# Altium PCB PCB1.PcbDoc
Units mil, origin at the board's own origin, x right, y up, seen from the top; angles counter-clockwise.
Board outline 6000 x 4000 mil, 2 copper layers (Top Layer, Bottom Layer); 173 components, 56 nets, 300 pads, 0 vias.
Unrouted connection lines stored in the file: 110.
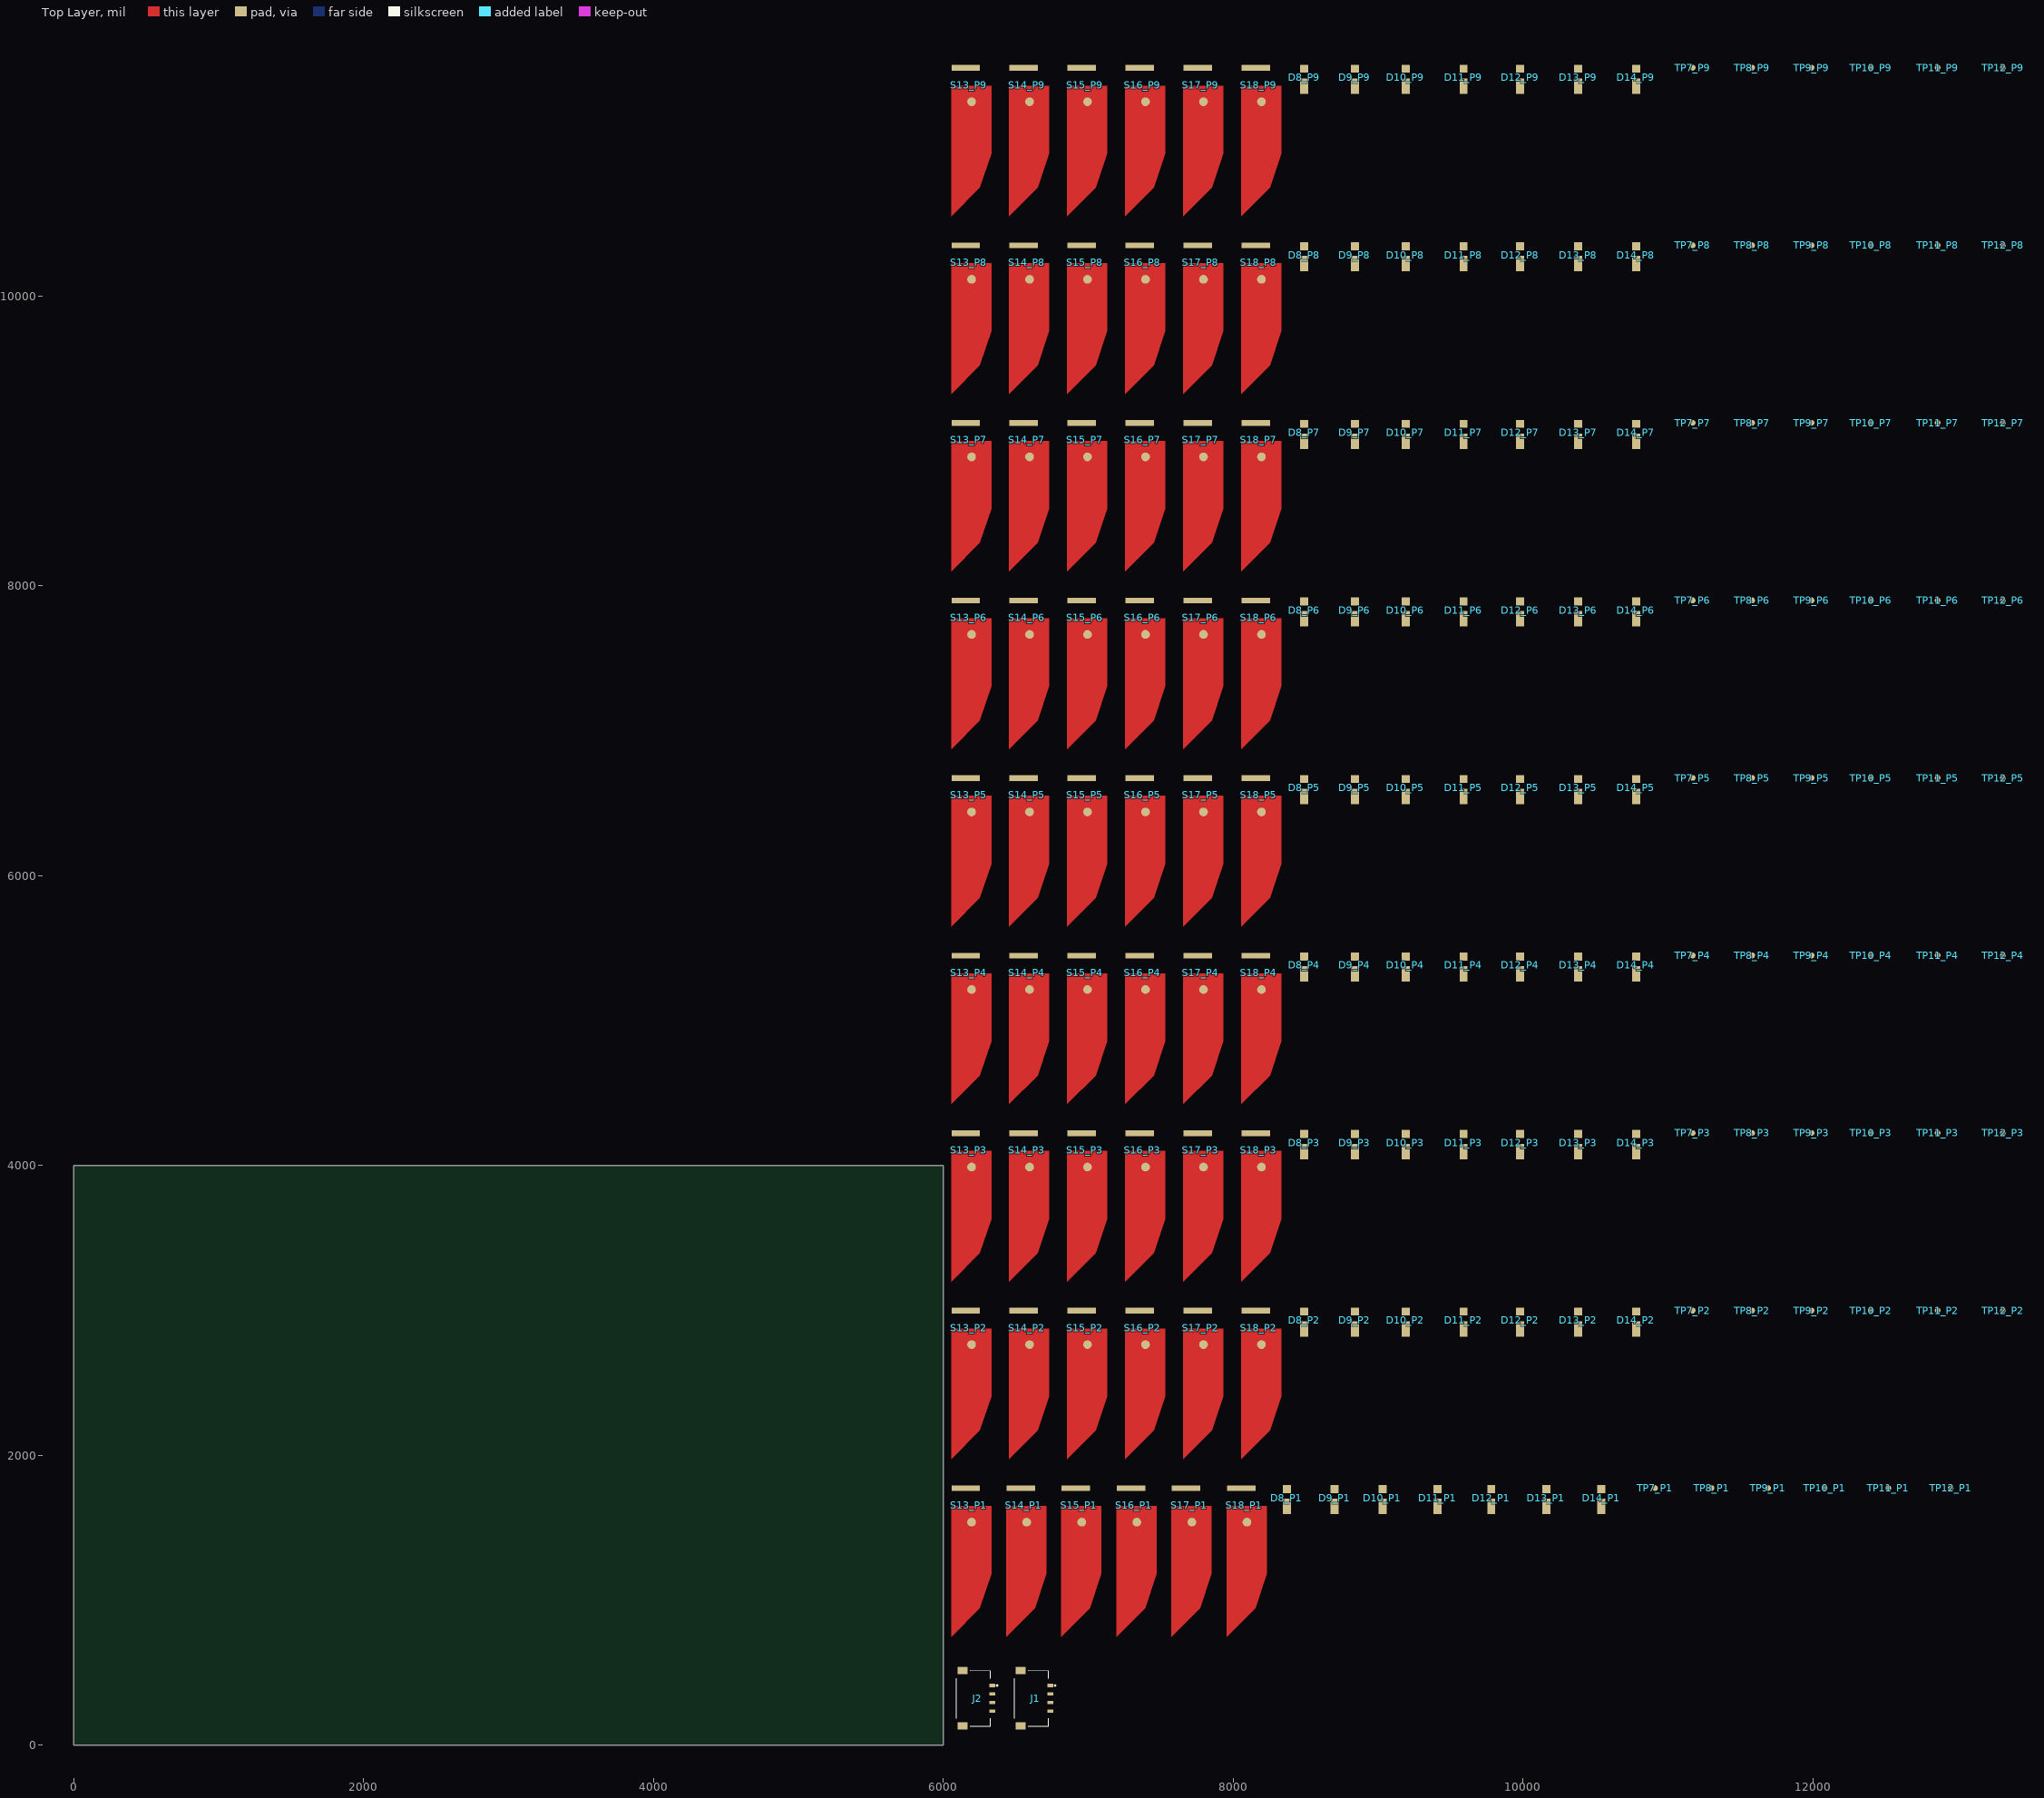
[diagram p0: Top Layer view]
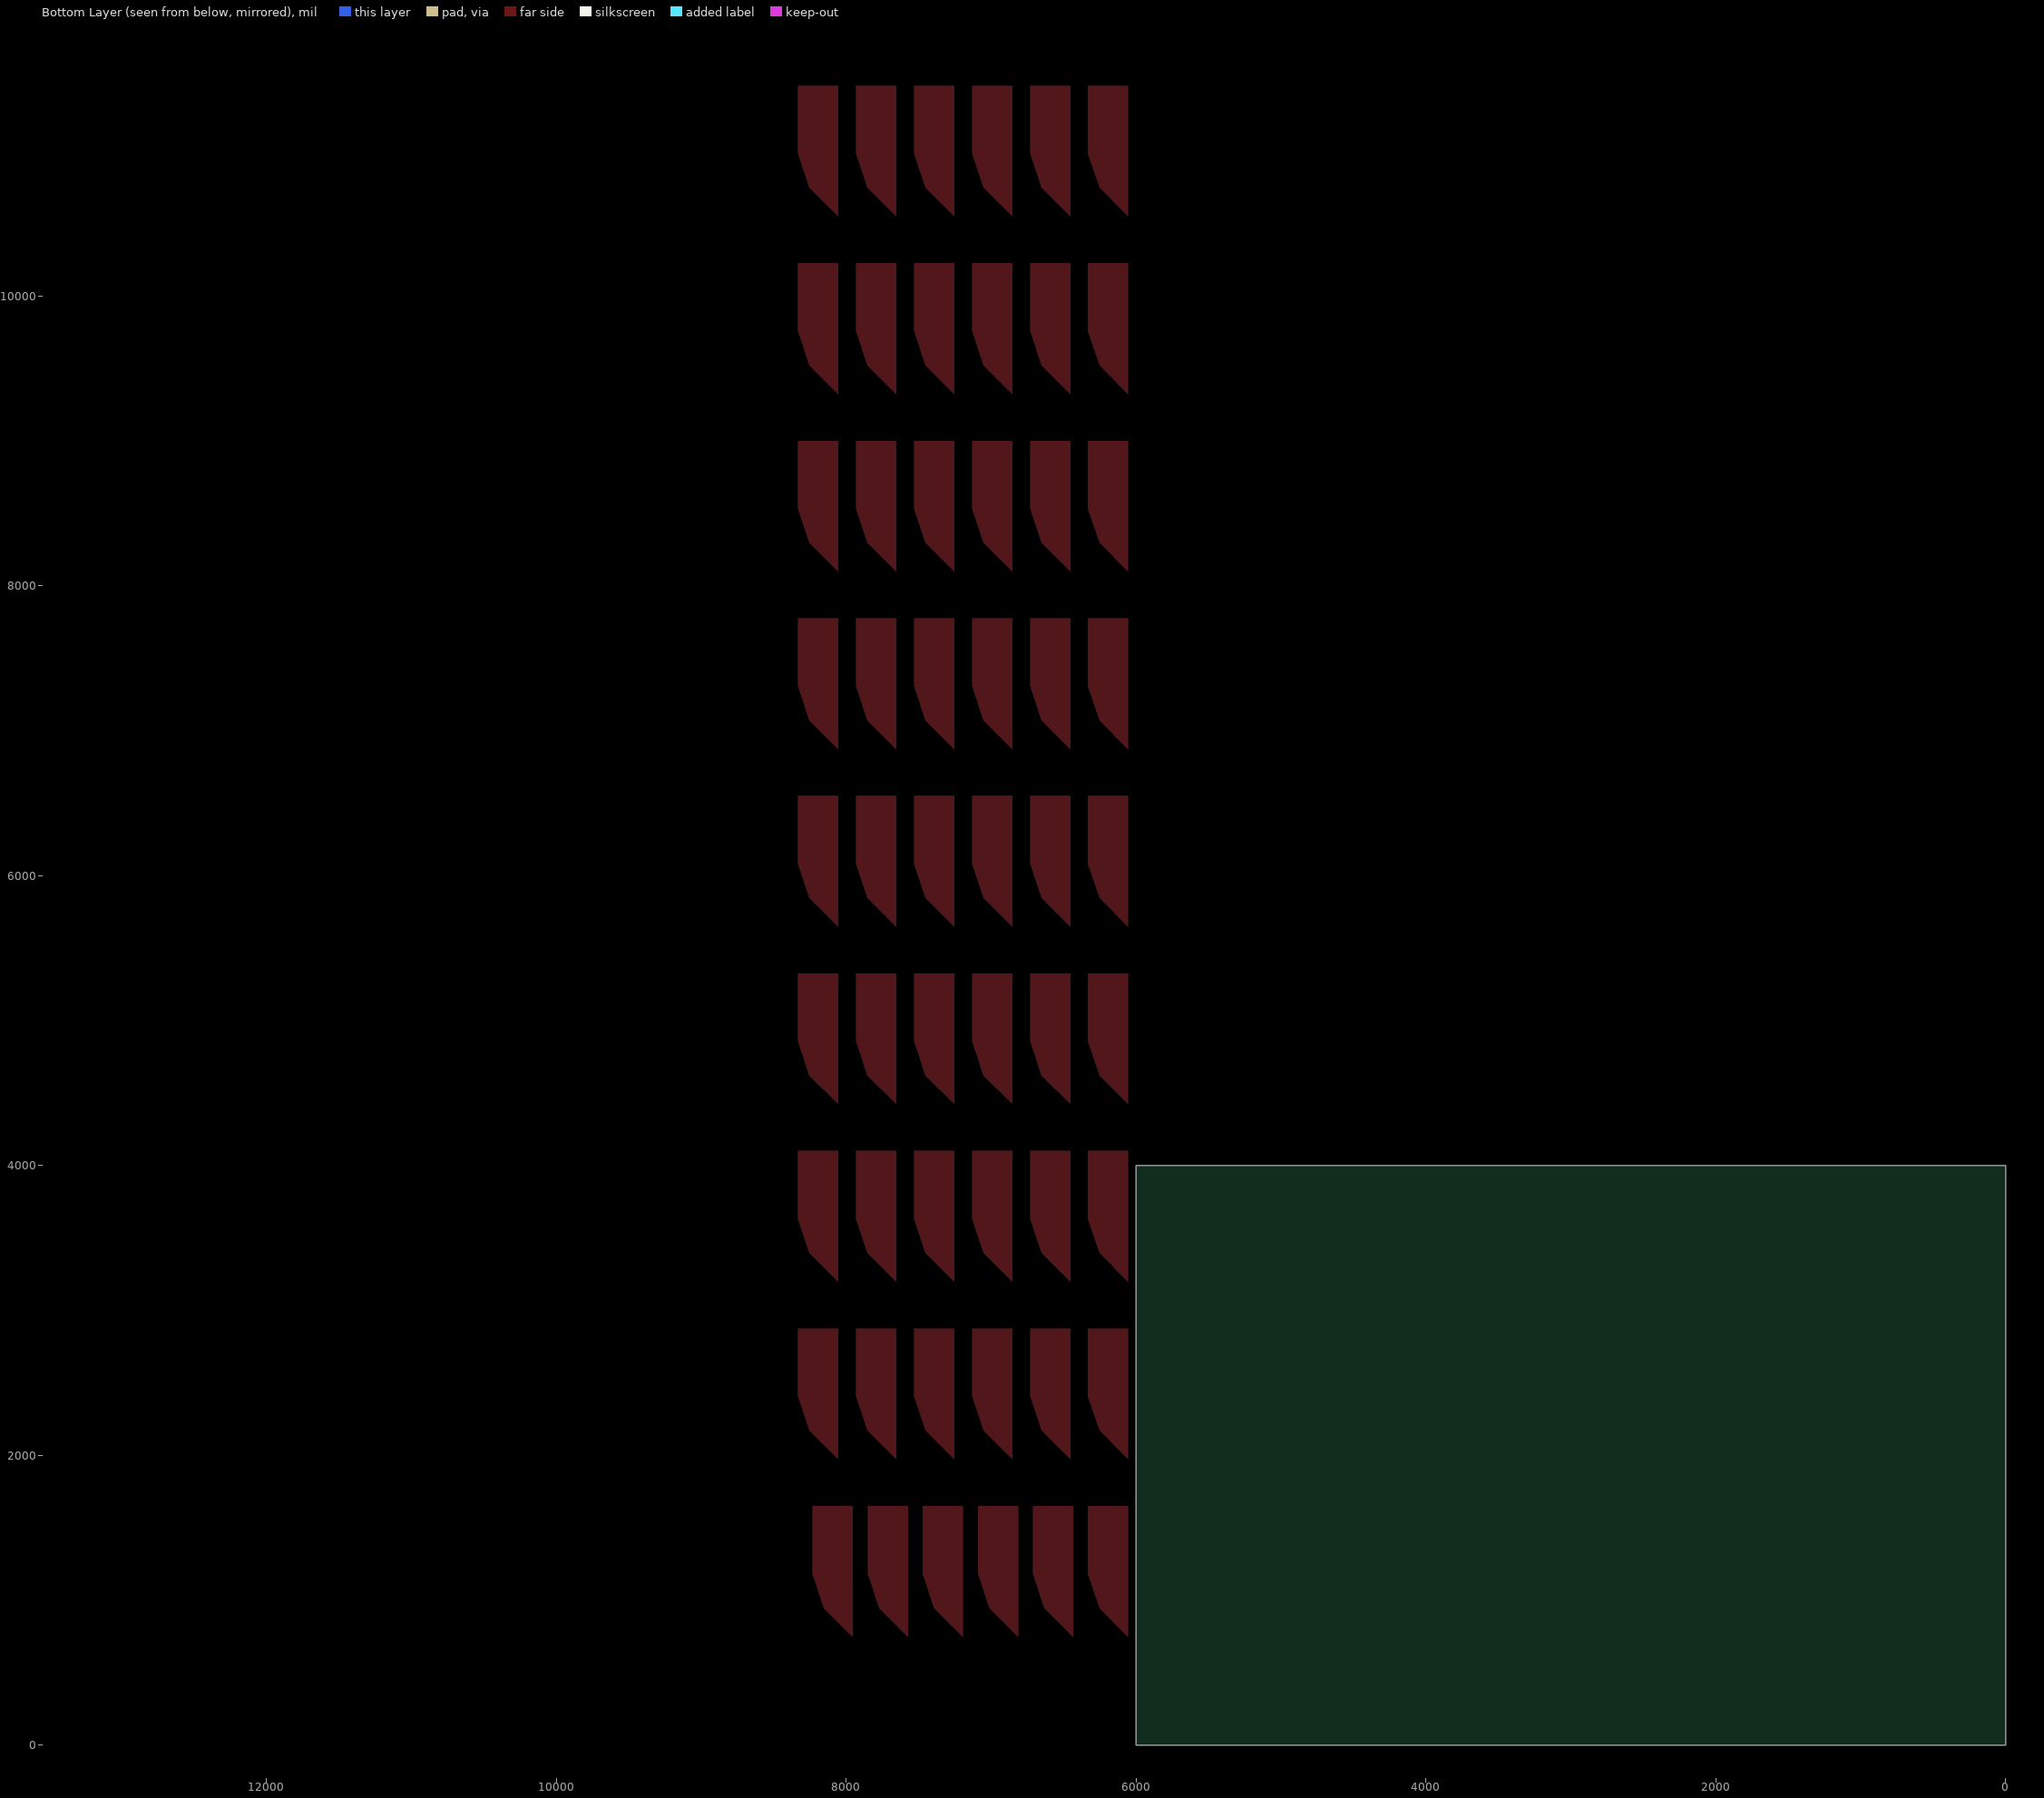
[diagram p1: Bottom Layer view, seen from below]

## Layer stack, top to bottom
Top Solder: solder mask 0.4, Solder Resist, Dk 3.5
Top Layer: signal copper 1.4
Dielectric 1: dielectric 12.6, FR-4, Dk 4.8
Bottom Layer: signal copper 1.4
Bottom Solder: solder mask 0.4, Solder Resist, Dk 3.5

## Board outline
0,0 6000,0 6000,4000 0,4000

## Design rules (kind name [scope] priority, off if disabled: settings)
Clearance [All] p1: gap=10 ignorepadtopadclearanceinfootprint=FALSE except(0: Arc-Hole Track-Hole SMDPad-Hole THPad-Hole Via-Hole Fill-Hole Poly-Hole Region-Hole Text-Hole)
PolygonConnect [All] p1: connectstyle=Relief reliefconductorwidth=10 reliefentries=4 polygonreliefangle="90 Angle" airgapwidth=10
RoomDefinition SolarPanel [InComponentClass('SolarPanel')] p1: confinementstyle=ConfineIn formatcopy=TRUE lockcomponents=FALSE outline 6045,60 6805,60 6805,690 6045,690
RoomDefinition P9 [InComponentClass('P9')] p2: confinementstyle=ConfineIn formatcopy=TRUE lockcomponents=FALSE outline 6045,10545 13705,10545 13705,11715 6045,11715
RoomDefinition P8 [InComponentClass('P8')] p3: confinementstyle=ConfineIn formatcopy=TRUE lockcomponents=FALSE outline 6045,9320 13705,9320 13705,10490 6045,10490
RoomDefinition P7 [InComponentClass('P7')] p4: confinementstyle=ConfineIn formatcopy=TRUE lockcomponents=FALSE outline 6045,8095 13705,8095 13705,9265 6045,9265
RoomDefinition P6 [InComponentClass('P6')] p5: confinementstyle=ConfineIn formatcopy=TRUE lockcomponents=FALSE outline 6045,6870 13705,6870 13705,8040 6045,8040
RoomDefinition P5 [InComponentClass('P5')] p6: confinementstyle=ConfineIn formatcopy=TRUE lockcomponents=FALSE outline 6045,5645 13705,5645 13705,6815 6045,6815
RoomDefinition P4 [InComponentClass('P4')] p7: confinementstyle=ConfineIn formatcopy=TRUE lockcomponents=FALSE outline 6045,4420 13705,4420 13705,5590 6045,5590
RoomDefinition P3 [InComponentClass('P3')] p8: confinementstyle=ConfineIn formatcopy=TRUE lockcomponents=FALSE outline 6045,3195 13705,3195 13705,4365 6045,4365
RoomDefinition P2 [InComponentClass('P2')] p9: confinementstyle=ConfineIn formatcopy=TRUE lockcomponents=FALSE outline 6045,1970 13705,1970 13705,3140 6045,3140
RoomDefinition P1 [InComponentClass('P1')] p10: confinementstyle=ConfineIn formatcopy=TRUE lockcomponents=FALSE outline 6045,745 13325,745 13325,1915 6045,1915
RoutingVias [All] p1: holewidth=28 width=50 viastyle="Through Hole" minholewidth=28 minwidth=50 maxholewidth=28 maxwidth=50
SolderMaskExpansion [All] p1: expansion=4
Width [All] p1: maxlimit=10 minlimit=10 preferedwidth=10
30 further rules are at their usual default settings.

## Classes and differential pairs
channel class RowSingle: P1 P2 P3 P4 P5 P6 P7 P8 P9
component class P8: D8_P8 D9_P8 D10_P8 D11_P8 D12_P8 D13_P8 D14_P8 S13_P8 S14_P8 S15_P8 S16_P8 S17_P8 S18_P8 TP7_P8 TP8_P8 TP9_P8 TP10_P8 TP11_P8 TP12_P8
component class P7: D8_P7 D9_P7 D10_P7 D11_P7 D12_P7 D13_P7 D14_P7 S13_P7 S14_P7 S15_P7 S16_P7 S17_P7 S18_P7 TP7_P7 TP8_P7 TP9_P7 TP10_P7 TP11_P7 TP12_P7
component class P6: D8_P6 D9_P6 D10_P6 D11_P6 D12_P6 D13_P6 D14_P6 S13_P6 S14_P6 S15_P6 S16_P6 S17_P6 S18_P6 TP7_P6 TP8_P6 TP9_P6 TP10_P6 TP11_P6 TP12_P6
component class P5: D8_P5 D9_P5 D10_P5 D11_P5 D12_P5 D13_P5 D14_P5 S13_P5 S14_P5 S15_P5 S16_P5 S17_P5 S18_P5 TP7_P5 TP8_P5 TP9_P5 TP10_P5 TP11_P5 TP12_P5
component class P4: D8_P4 D9_P4 D10_P4 D11_P4 D12_P4 D13_P4 D14_P4 S13_P4 S14_P4 S15_P4 S16_P4 S17_P4 S18_P4 TP7_P4 TP8_P4 TP9_P4 TP10_P4 TP11_P4 TP12_P4
component class P3: D8_P3 D9_P3 D10_P3 D11_P3 D12_P3 D13_P3 D14_P3 S13_P3 S14_P3 S15_P3 S16_P3 S17_P3 S18_P3 TP7_P3 TP8_P3 TP9_P3 TP10_P3 TP11_P3 TP12_P3
component class P2: D8_P2 D9_P2 D10_P2 D11_P2 D12_P2 D13_P2 D14_P2 S13_P2 S14_P2 S15_P2 S16_P2 S17_P2 S18_P2 TP7_P2 TP8_P2 TP9_P2 TP10_P2 TP11_P2 TP12_P2
component class P1: D8_P1 D9_P1 D10_P1 D11_P1 D12_P1 D13_P1 D14_P1 S13_P1 S14_P1 S15_P1 S16_P1 S17_P1 S18_P1 TP7_P1 TP8_P1 TP9_P1 TP10_P1 TP11_P1 TP12_P1
component class P9: D8_P9 D9_P9 D10_P9 D11_P9 D12_P9 D13_P9 D14_P9 S13_P9 S14_P9 S15_P9 S16_P9 S17_P9 S18_P9 TP7_P9 TP8_P9 TP9_P9 TP10_P9 TP11_P9 TP12_P9
component class SolarPanel: J1 J2

## Components (designator, comment, footprint, x,y, rotation, side; value= is the part's Value field where it differs from the comment)
D8_P1 "SCHOTTKY_DIODE_B120-FDICT-NDSCHOTTKY_DIODE_B120-FDICT-ND" SB_DIODE 8370,1695 r90 top (schematic designator D8)
D8_P2 "SCHOTTKY_DIODE_B120-FDICT-NDSCHOTTKY_DIODE_B120-FDICT-ND" SB_DIODE 8490,2920 r90 top (schematic designator D8)
D8_P3 "SCHOTTKY_DIODE_B120-FDICT-NDSCHOTTKY_DIODE_B120-FDICT-ND" SB_DIODE 8490,4145 r90 top (schematic designator D8)
D8_P4 "SCHOTTKY_DIODE_B120-FDICT-NDSCHOTTKY_DIODE_B120-FDICT-ND" SB_DIODE 8490,5370 r90 top (schematic designator D8)
D8_P5 "SCHOTTKY_DIODE_B120-FDICT-NDSCHOTTKY_DIODE_B120-FDICT-ND" SB_DIODE 8490,6595 r90 top (schematic designator D8)
D8_P6 "SCHOTTKY_DIODE_B120-FDICT-NDSCHOTTKY_DIODE_B120-FDICT-ND" SB_DIODE 8490,7820 r90 top (schematic designator D8)
D8_P7 "SCHOTTKY_DIODE_B120-FDICT-NDSCHOTTKY_DIODE_B120-FDICT-ND" SB_DIODE 8490,9045 r90 top (schematic designator D8)
D8_P8 "SCHOTTKY_DIODE_B120-FDICT-NDSCHOTTKY_DIODE_B120-FDICT-ND" SB_DIODE 8490,10270 r90 top (schematic designator D8)
D8_P9 "SCHOTTKY_DIODE_B120-FDICT-NDSCHOTTKY_DIODE_B120-FDICT-ND" SB_DIODE 8490,11495 r90 top (schematic designator D8)
D9_P1 "SCHOTTKY_DIODE_B120-FDICT-NDSCHOTTKY_DIODE_B120-FDICT-ND" SB_DIODE 8700,1695 r90 top (schematic designator D9)
D9_P2 "SCHOTTKY_DIODE_B120-FDICT-NDSCHOTTKY_DIODE_B120-FDICT-ND" SB_DIODE 8840,2920 r90 top (schematic designator D9)
D9_P3 "SCHOTTKY_DIODE_B120-FDICT-NDSCHOTTKY_DIODE_B120-FDICT-ND" SB_DIODE 8840,4145 r90 top (schematic designator D9)
D9_P4 "SCHOTTKY_DIODE_B120-FDICT-NDSCHOTTKY_DIODE_B120-FDICT-ND" SB_DIODE 8840,5370 r90 top (schematic designator D9)
D9_P5 "SCHOTTKY_DIODE_B120-FDICT-NDSCHOTTKY_DIODE_B120-FDICT-ND" SB_DIODE 8840,6595 r90 top (schematic designator D9)
D9_P6 "SCHOTTKY_DIODE_B120-FDICT-NDSCHOTTKY_DIODE_B120-FDICT-ND" SB_DIODE 8840,7820 r90 top (schematic designator D9)
D9_P7 "SCHOTTKY_DIODE_B120-FDICT-NDSCHOTTKY_DIODE_B120-FDICT-ND" SB_DIODE 8840,9045 r90 top (schematic designator D9)
D9_P8 "SCHOTTKY_DIODE_B120-FDICT-NDSCHOTTKY_DIODE_B120-FDICT-ND" SB_DIODE 8840,10270 r90 top (schematic designator D9)
D9_P9 "SCHOTTKY_DIODE_B120-FDICT-NDSCHOTTKY_DIODE_B120-FDICT-ND" SB_DIODE 8840,11495 r90 top (schematic designator D9)
D10_P1 "SCHOTTKY_DIODE_B120-FDICT-NDSCHOTTKY_DIODE_B120-FDICT-ND" SB_DIODE 9030,1695 r90 top (schematic designator D10)
D10_P2 "SCHOTTKY_DIODE_B120-FDICT-NDSCHOTTKY_DIODE_B120-FDICT-ND" SB_DIODE 9190,2920 r90 top (schematic designator D10)
D10_P3 "SCHOTTKY_DIODE_B120-FDICT-NDSCHOTTKY_DIODE_B120-FDICT-ND" SB_DIODE 9190,4145 r90 top (schematic designator D10)
D10_P4 "SCHOTTKY_DIODE_B120-FDICT-NDSCHOTTKY_DIODE_B120-FDICT-ND" SB_DIODE 9190,5370 r90 top (schematic designator D10)
D10_P5 "SCHOTTKY_DIODE_B120-FDICT-NDSCHOTTKY_DIODE_B120-FDICT-ND" SB_DIODE 9190,6595 r90 top (schematic designator D10)
D10_P6 "SCHOTTKY_DIODE_B120-FDICT-NDSCHOTTKY_DIODE_B120-FDICT-ND" SB_DIODE 9190,7820 r90 top (schematic designator D10)
D10_P7 "SCHOTTKY_DIODE_B120-FDICT-NDSCHOTTKY_DIODE_B120-FDICT-ND" SB_DIODE 9190,9045 r90 top (schematic designator D10)
D10_P8 "SCHOTTKY_DIODE_B120-FDICT-NDSCHOTTKY_DIODE_B120-FDICT-ND" SB_DIODE 9190,10270 r90 top (schematic designator D10)
D10_P9 "SCHOTTKY_DIODE_B120-FDICT-NDSCHOTTKY_DIODE_B120-FDICT-ND" SB_DIODE 9190,11495 r90 top (schematic designator D10)
D11_P1 "SCHOTTKY_DIODE_B120-FDICT-NDSCHOTTKY_DIODE_B120-FDICT-ND" SB_DIODE 9410,1695 r90 top (schematic designator D11)
D11_P2 "SCHOTTKY_DIODE_B120-FDICT-NDSCHOTTKY_DIODE_B120-FDICT-ND" SB_DIODE 9590,2920 r90 top (schematic designator D11)
D11_P3 "SCHOTTKY_DIODE_B120-FDICT-NDSCHOTTKY_DIODE_B120-FDICT-ND" SB_DIODE 9590,4145 r90 top (schematic designator D11)
D11_P4 "SCHOTTKY_DIODE_B120-FDICT-NDSCHOTTKY_DIODE_B120-FDICT-ND" SB_DIODE 9590,5370 r90 top (schematic designator D11)
D11_P5 "SCHOTTKY_DIODE_B120-FDICT-NDSCHOTTKY_DIODE_B120-FDICT-ND" SB_DIODE 9590,6595 r90 top (schematic designator D11)
D11_P6 "SCHOTTKY_DIODE_B120-FDICT-NDSCHOTTKY_DIODE_B120-FDICT-ND" SB_DIODE 9590,7820 r90 top (schematic designator D11)
D11_P7 "SCHOTTKY_DIODE_B120-FDICT-NDSCHOTTKY_DIODE_B120-FDICT-ND" SB_DIODE 9590,9045 r90 top (schematic designator D11)
D11_P8 "SCHOTTKY_DIODE_B120-FDICT-NDSCHOTTKY_DIODE_B120-FDICT-ND" SB_DIODE 9590,10270 r90 top (schematic designator D11)
D11_P9 "SCHOTTKY_DIODE_B120-FDICT-NDSCHOTTKY_DIODE_B120-FDICT-ND" SB_DIODE 9590,11495 r90 top (schematic designator D11)
D12_P1 "SCHOTTKY_DIODE_B120-FDICT-NDSCHOTTKY_DIODE_B120-FDICT-ND" SB_DIODE 9780,1695 r90 top (schematic designator D12)
D12_P2 "SCHOTTKY_DIODE_B120-FDICT-NDSCHOTTKY_DIODE_B120-FDICT-ND" SB_DIODE 9980,2920 r90 top (schematic designator D12)
D12_P3 "SCHOTTKY_DIODE_B120-FDICT-NDSCHOTTKY_DIODE_B120-FDICT-ND" SB_DIODE 9980,4145 r90 top (schematic designator D12)
D12_P4 "SCHOTTKY_DIODE_B120-FDICT-NDSCHOTTKY_DIODE_B120-FDICT-ND" SB_DIODE 9980,5370 r90 top (schematic designator D12)
D12_P5 "SCHOTTKY_DIODE_B120-FDICT-NDSCHOTTKY_DIODE_B120-FDICT-ND" SB_DIODE 9980,6595 r90 top (schematic designator D12)
D12_P6 "SCHOTTKY_DIODE_B120-FDICT-NDSCHOTTKY_DIODE_B120-FDICT-ND" SB_DIODE 9980,7820 r90 top (schematic designator D12)
D12_P7 "SCHOTTKY_DIODE_B120-FDICT-NDSCHOTTKY_DIODE_B120-FDICT-ND" SB_DIODE 9980,9045 r90 top (schematic designator D12)
D12_P8 "SCHOTTKY_DIODE_B120-FDICT-NDSCHOTTKY_DIODE_B120-FDICT-ND" SB_DIODE 9980,10270 r90 top (schematic designator D12)
D12_P9 "SCHOTTKY_DIODE_B120-FDICT-NDSCHOTTKY_DIODE_B120-FDICT-ND" SB_DIODE 9980,11495 r90 top (schematic designator D12)
D13_P1 "SCHOTTKY_DIODE_B120-FDICT-NDSCHOTTKY_DIODE_B120-FDICT-ND" SB_DIODE 10160,1695 r90 top (schematic designator D13)
D13_P2 "SCHOTTKY_DIODE_B120-FDICT-NDSCHOTTKY_DIODE_B120-FDICT-ND" SB_DIODE 10380,2920 r90 top (schematic designator D13)
D13_P3 "SCHOTTKY_DIODE_B120-FDICT-NDSCHOTTKY_DIODE_B120-FDICT-ND" SB_DIODE 10380,4145 r90 top (schematic designator D13)
D13_P4 "SCHOTTKY_DIODE_B120-FDICT-NDSCHOTTKY_DIODE_B120-FDICT-ND" SB_DIODE 10380,5370 r90 top (schematic designator D13)
D13_P5 "SCHOTTKY_DIODE_B120-FDICT-NDSCHOTTKY_DIODE_B120-FDICT-ND" SB_DIODE 10380,6595 r90 top (schematic designator D13)
D13_P6 "SCHOTTKY_DIODE_B120-FDICT-NDSCHOTTKY_DIODE_B120-FDICT-ND" SB_DIODE 10380,7820 r90 top (schematic designator D13)
D13_P7 "SCHOTTKY_DIODE_B120-FDICT-NDSCHOTTKY_DIODE_B120-FDICT-ND" SB_DIODE 10380,9045 r90 top (schematic designator D13)
D13_P8 "SCHOTTKY_DIODE_B120-FDICT-NDSCHOTTKY_DIODE_B120-FDICT-ND" SB_DIODE 10380,10270 r90 top (schematic designator D13)
D13_P9 "SCHOTTKY_DIODE_B120-FDICT-NDSCHOTTKY_DIODE_B120-FDICT-ND" SB_DIODE 10380,11495 r90 top (schematic designator D13)
D14_P1 "SCHOTTKY_DIODE_B120-FDICT-NDSCHOTTKY_DIODE_B120-FDICT-ND" SB_DIODE 10540,1695 r90 top (schematic designator D14)
D14_P2 "SCHOTTKY_DIODE_B120-FDICT-NDSCHOTTKY_DIODE_B120-FDICT-ND" SB_DIODE 10780,2920 r90 top (schematic designator D14)
D14_P3 "SCHOTTKY_DIODE_B120-FDICT-NDSCHOTTKY_DIODE_B120-FDICT-ND" SB_DIODE 10780,4145 r90 top (schematic designator D14)
D14_P4 "SCHOTTKY_DIODE_B120-FDICT-NDSCHOTTKY_DIODE_B120-FDICT-ND" SB_DIODE 10780,5370 r90 top (schematic designator D14)
D14_P5 "SCHOTTKY_DIODE_B120-FDICT-NDSCHOTTKY_DIODE_B120-FDICT-ND" SB_DIODE 10780,6595 r90 top (schematic designator D14)
D14_P6 "SCHOTTKY_DIODE_B120-FDICT-NDSCHOTTKY_DIODE_B120-FDICT-ND" SB_DIODE 10780,7820 r90 top (schematic designator D14)
D14_P7 "SCHOTTKY_DIODE_B120-FDICT-NDSCHOTTKY_DIODE_B120-FDICT-ND" SB_DIODE 10780,9045 r90 top (schematic designator D14)
D14_P8 "SCHOTTKY_DIODE_B120-FDICT-NDSCHOTTKY_DIODE_B120-FDICT-ND" SB_DIODE 10780,10270 r90 top (schematic designator D14)
D14_P9 "SCHOTTKY_DIODE_B120-FDICT-NDSCHOTTKY_DIODE_B120-FDICT-ND" SB_DIODE 10780,11495 r90 top (schematic designator D14)
J1 "5040500491" 5040500491 6610,325 r90 top
J2 "5040500491" 5040500491 6210,325 r90 top
S13_P1 "SOLAR_CELL" SOLAR_CELL 6055,750 r0 top (schematic designator S13)
S13_P2 "SOLAR_CELL" SOLAR_CELL 6055,1975 r0 top (schematic designator S13)
S13_P3 "SOLAR_CELL" SOLAR_CELL 6055,3200 r0 top (schematic designator S13)
S13_P4 "SOLAR_CELL" SOLAR_CELL 6055,4425 r0 top (schematic designator S13)
S13_P5 "SOLAR_CELL" SOLAR_CELL 6055,5650 r0 top (schematic designator S13)
S13_P6 "SOLAR_CELL" SOLAR_CELL 6055,6875 r0 top (schematic designator S13)
S13_P7 "SOLAR_CELL" SOLAR_CELL 6055,8100 r0 top (schematic designator S13)
S13_P8 "SOLAR_CELL" SOLAR_CELL 6055,9325 r0 top (schematic designator S13)
S13_P9 "SOLAR_CELL" SOLAR_CELL 6055,10550 r0 top (schematic designator S13)
S14_P1 "SOLAR_CELL" SOLAR_CELL 6435,750 r0 top (schematic designator S14)
S14_P2 "SOLAR_CELL" SOLAR_CELL 6455,1975 r0 top (schematic designator S14)
S14_P3 "SOLAR_CELL" SOLAR_CELL 6455,3200 r0 top (schematic designator S14)
S14_P4 "SOLAR_CELL" SOLAR_CELL 6455,4425 r0 top (schematic designator S14)
S14_P5 "SOLAR_CELL" SOLAR_CELL 6455,5650 r0 top (schematic designator S14)
S14_P6 "SOLAR_CELL" SOLAR_CELL 6455,6875 r0 top (schematic designator S14)
S14_P7 "SOLAR_CELL" SOLAR_CELL 6455,8100 r0 top (schematic designator S14)
S14_P8 "SOLAR_CELL" SOLAR_CELL 6455,9325 r0 top (schematic designator S14)
S14_P9 "SOLAR_CELL" SOLAR_CELL 6455,10550 r0 top (schematic designator S14)
S15_P1 "SOLAR_CELL" SOLAR_CELL 6815,750 r0 top (schematic designator S15)
S15_P2 "SOLAR_CELL" SOLAR_CELL 6855,1975 r0 top (schematic designator S15)
S15_P3 "SOLAR_CELL" SOLAR_CELL 6855,3200 r0 top (schematic designator S15)
S15_P4 "SOLAR_CELL" SOLAR_CELL 6855,4425 r0 top (schematic designator S15)
S15_P5 "SOLAR_CELL" SOLAR_CELL 6855,5650 r0 top (schematic designator S15)
S15_P6 "SOLAR_CELL" SOLAR_CELL 6855,6875 r0 top (schematic designator S15)
S15_P7 "SOLAR_CELL" SOLAR_CELL 6855,8100 r0 top (schematic designator S15)
S15_P8 "SOLAR_CELL" SOLAR_CELL 6855,9325 r0 top (schematic designator S15)
S15_P9 "SOLAR_CELL" SOLAR_CELL 6855,10550 r0 top (schematic designator S15)
S16_P1 "SOLAR_CELL" SOLAR_CELL 7195,750 r0 top (schematic designator S16)
S16_P2 "SOLAR_CELL" SOLAR_CELL 7255,1975 r0 top (schematic designator S16)
S16_P3 "SOLAR_CELL" SOLAR_CELL 7255,3200 r0 top (schematic designator S16)
S16_P4 "SOLAR_CELL" SOLAR_CELL 7255,4425 r0 top (schematic designator S16)
S16_P5 "SOLAR_CELL" SOLAR_CELL 7255,5650 r0 top (schematic designator S16)
S16_P6 "SOLAR_CELL" SOLAR_CELL 7255,6875 r0 top (schematic designator S16)
S16_P7 "SOLAR_CELL" SOLAR_CELL 7255,8100 r0 top (schematic designator S16)
S16_P8 "SOLAR_CELL" SOLAR_CELL 7255,9325 r0 top (schematic designator S16)
S16_P9 "SOLAR_CELL" SOLAR_CELL 7255,10550 r0 top (schematic designator S16)
S17_P1 "SOLAR_CELL" SOLAR_CELL 7575,750 r0 top (schematic designator S17)
S17_P2 "SOLAR_CELL" SOLAR_CELL 7655,1975 r0 top (schematic designator S17)
S17_P3 "SOLAR_CELL" SOLAR_CELL 7655,3200 r0 top (schematic designator S17)
S17_P4 "SOLAR_CELL" SOLAR_CELL 7655,4425 r0 top (schematic designator S17)
S17_P5 "SOLAR_CELL" SOLAR_CELL 7655,5650 r0 top (schematic designator S17)
S17_P6 "SOLAR_CELL" SOLAR_CELL 7655,6875 r0 top (schematic designator S17)
S17_P7 "SOLAR_CELL" SOLAR_CELL 7655,8100 r0 top (schematic designator S17)
S17_P8 "SOLAR_CELL" SOLAR_CELL 7655,9325 r0 top (schematic designator S17)
S17_P9 "SOLAR_CELL" SOLAR_CELL 7655,10550 r0 top (schematic designator S17)
S18_P1 "SOLAR_CELL" SOLAR_CELL 7955,750 r0 top (schematic designator S18)
S18_P2 "SOLAR_CELL" SOLAR_CELL 8055,1975 r0 top (schematic designator S18)
S18_P3 "SOLAR_CELL" SOLAR_CELL 8055,3200 r0 top (schematic designator S18)
S18_P4 "SOLAR_CELL" SOLAR_CELL 8055,4425 r0 top (schematic designator S18)
S18_P5 "SOLAR_CELL" SOLAR_CELL 8055,5650 r0 top (schematic designator S18)
S18_P6 "SOLAR_CELL" SOLAR_CELL 8055,6875 r0 top (schematic designator S18)
S18_P7 "SOLAR_CELL" SOLAR_CELL 8055,8100 r0 top (schematic designator S18)
S18_P8 "SOLAR_CELL" SOLAR_CELL 8055,9325 r0 top (schematic designator S18)
S18_P9 "SOLAR_CELL" SOLAR_CELL 8055,10550 r0 top (schematic designator S18)
TP7_P1 "TEST_POINT" TEST_POINT 10910,1775 r90 top (schematic designator TP7)
TP7_P2 "TEST_POINT" TEST_POINT 11170,3000 r90 top (schematic designator TP7)
TP7_P3 "TEST_POINT" TEST_POINT 11170,4225 r90 top (schematic designator TP7)
TP7_P4 "TEST_POINT" TEST_POINT 11170,5450 r90 top (schematic designator TP7)
TP7_P5 "TEST_POINT" TEST_POINT 11170,6675 r90 top (schematic designator TP7)
TP7_P6 "TEST_POINT" TEST_POINT 11170,7900 r90 top (schematic designator TP7)
TP7_P7 "TEST_POINT" TEST_POINT 11170,9125 r90 top (schematic designator TP7)
TP7_P8 "TEST_POINT" TEST_POINT 11170,10350 r90 top (schematic designator TP7)
TP7_P9 "TEST_POINT" TEST_POINT 11170,11575 r90 top (schematic designator TP7)
TP8_P1 "TEST_POINT" TEST_POINT 11300,1775 r90 top (schematic designator TP8)
TP8_P2 "TEST_POINT" TEST_POINT 11580,3000 r90 top (schematic designator TP8)
TP8_P3 "TEST_POINT" TEST_POINT 11580,4225 r90 top (schematic designator TP8)
TP8_P4 "TEST_POINT" TEST_POINT 11580,5450 r90 top (schematic designator TP8)
TP8_P5 "TEST_POINT" TEST_POINT 11580,6675 r90 top (schematic designator TP8)
TP8_P6 "TEST_POINT" TEST_POINT 11580,7900 r90 top (schematic designator TP8)
TP8_P7 "TEST_POINT" TEST_POINT 11580,9125 r90 top (schematic designator TP8)
TP8_P8 "TEST_POINT" TEST_POINT 11580,10350 r90 top (schematic designator TP8)
TP8_P9 "TEST_POINT" TEST_POINT 11580,11575 r90 top (schematic designator TP8)
TP9_P1 "TEST_POINT" TEST_POINT 11690,1775 r90 top (schematic designator TP9)
TP9_P2 "TEST_POINT" TEST_POINT 11990,3000 r90 top (schematic designator TP9)
TP9_P3 "TEST_POINT" TEST_POINT 11990,4225 r90 top (schematic designator TP9)
TP9_P4 "TEST_POINT" TEST_POINT 11990,5450 r90 top (schematic designator TP9)
TP9_P5 "TEST_POINT" TEST_POINT 11990,6675 r90 top (schematic designator TP9)
TP9_P6 "TEST_POINT" TEST_POINT 11990,7900 r90 top (schematic designator TP9)
TP9_P7 "TEST_POINT" TEST_POINT 11990,9125 r90 top (schematic designator TP9)
TP9_P8 "TEST_POINT" TEST_POINT 11990,10350 r90 top (schematic designator TP9)
TP9_P9 "TEST_POINT" TEST_POINT 11990,11575 r90 top (schematic designator TP9)
TP10_P1 "TEST_POINT" TEST_POINT 12080,1775 r90 top (schematic designator TP10)
TP10_P2 "TEST_POINT" TEST_POINT 12400,3000 r90 top (schematic designator TP10)
TP10_P3 "TEST_POINT" TEST_POINT 12400,4225 r90 top (schematic designator TP10)
TP10_P4 "TEST_POINT" TEST_POINT 12400,5450 r90 top (schematic designator TP10)
TP10_P5 "TEST_POINT" TEST_POINT 12400,6675 r90 top (schematic designator TP10)
TP10_P6 "TEST_POINT" TEST_POINT 12400,7900 r90 top (schematic designator TP10)
TP10_P7 "TEST_POINT" TEST_POINT 12400,9125 r90 top (schematic designator TP10)
TP10_P8 "TEST_POINT" TEST_POINT 12400,10350 r90 top (schematic designator TP10)
TP10_P9 "TEST_POINT" TEST_POINT 12400,11575 r90 top (schematic designator TP10)
TP11_P1 "TEST_POINT" TEST_POINT 12520,1775 r90 top (schematic designator TP11)
TP11_P2 "TEST_POINT" TEST_POINT 12860,3000 r90 top (schematic designator TP11)
TP11_P3 "TEST_POINT" TEST_POINT 12860,4225 r90 top (schematic designator TP11)
TP11_P4 "TEST_POINT" TEST_POINT 12860,5450 r90 top (schematic designator TP11)
TP11_P5 "TEST_POINT" TEST_POINT 12860,6675 r90 top (schematic designator TP11)
TP11_P6 "TEST_POINT" TEST_POINT 12860,7900 r90 top (schematic designator TP11)
TP11_P7 "TEST_POINT" TEST_POINT 12860,9125 r90 top (schematic designator TP11)
TP11_P8 "TEST_POINT" TEST_POINT 12860,10350 r90 top (schematic designator TP11)
TP11_P9 "TEST_POINT" TEST_POINT 12860,11575 r90 top (schematic designator TP11)
TP12_P1 "TEST_POINT" TEST_POINT 12950,1775 r90 top (schematic designator TP12)
TP12_P2 "TEST_POINT" TEST_POINT 13310,3000 r90 top (schematic designator TP12)
TP12_P3 "TEST_POINT" TEST_POINT 13310,4225 r90 top (schematic designator TP12)
TP12_P4 "TEST_POINT" TEST_POINT 13310,5450 r90 top (schematic designator TP12)
TP12_P5 "TEST_POINT" TEST_POINT 13310,6675 r90 top (schematic designator TP12)
TP12_P6 "TEST_POINT" TEST_POINT 13310,7900 r90 top (schematic designator TP12)
TP12_P7 "TEST_POINT" TEST_POINT 13310,9125 r90 top (schematic designator TP12)
TP12_P8 "TEST_POINT" TEST_POINT 13310,10350 r90 top (schematic designator TP12)
TP12_P9 "TEST_POINT" TEST_POINT 13310,11575 r90 top (schematic designator TP12)

## Footprints (in the part's own frame and the unit in brackets; to place one, negate y for a bottom-side part, rotate by r counter-clockwise, add the part's x,y. Pads: shape width x height; smd on the part's side, far side on the other; paste and mask are expansions set on the pad)
5040500491 [mm]
  rect 0.6x1 smd: 1(2.25,-3.247) 2(0.75,-3.247) 3(-0.75,-3.247) 4(-2.25,-3.247)
  rect 1.25x1.8 smd: MP1(4.855,1.943) MP2(-4.855,1.943)
  silkscreen extent -4.87,-4.2 4.87,3, body extent 0,0 0,0
SB_DIODE [mil]
  rect 106.3x55.12 smd: NEG(-47.24,0)
  rect 55.12x55.12 smd: POS(72.83,0)
SOLAR_CELL [mil]
  rect 196.85x39.37 smd: NEG(100,1023.62)
  round 60 smd: POS(140,790)
  Top Layer region: 0,900 275.59,900 275.59,433.07 196.85,196.85 0,0
TEST_POINT [mil]
  round 40 smd: PAD(0,0)

## Part data
D8_P1 D8_P2 D8_P3 D8_P4 D8_P5 D8_P6 D8_P7 D8_P8 D8_P9 D9_P1 D9_P2 D9_P3 D9_P4 D9_P5 D9_P6 D9_P7 D9_P8 D9_P9 D10_P1 D10_P2 D10_P3 D10_P4 D10_P5 D10_P6 D10_P7 D10_P8 D10_P9 D11_P1 D11_P2 D11_P3 D11_P4 D11_P5 D11_P6 D11_P7 D11_P8 D11_P9 D12_P1 D12_P2 D12_P3 D12_P4 D12_P5 D12_P6 D12_P7 D12_P8 D12_P9 D13_P1 D13_P2 D13_P3 D13_P4 D13_P5 D13_P6 D13_P7 D13_P8 D13_P9 D14_P1 D14_P2 D14_P3 D14_P4 D14_P5 D14_P6 D14_P7 D14_P8 D14_P9: Package=SCHOTTKY_DIODE_B120-FDICT-ND, DeviceName=SCHOTTKY_DIODE_B120-FDICT-ND, DeviceSetName=SCHOTTKY_DIODE_B120-FDICT-ND, GateName_1=G$1, LibraryName=Solar_Fadi, SymbolName_1=SCHOTTKY_DIODE_B120-FDICT-ND
J1 J2: "Connector", Manufacturer_Name=Molex, Allied_Number=70331790, Allied Price/Stock=https://www.alliedelec.com/molex-incorporated-5040500491/70331790/, Datasheet Link=https://www.molex.com/pdm_docs/sd/5040500691_sd.pdf, Height=2.15mm, Manufacturer_Part_Number=5040500491

## Nets (pads, with @x,y where several pads share a name; then routed paths per layer and width w, separated by ;. In a path a pad name is that pad's centre, name@x,y a point inside that pad or via, vN(x,y) a via of type N, cw(c..) or ccw(c..) an arc to the next point about the centre after c; other vN are vias at no path point)
GND: D8_P1.POS D8_P2.POS D8_P3.POS D8_P4.POS D8_P5.POS D8_P6.POS D8_P7.POS D8_P8.POS D8_P9.POS J1.2 J1.3
NetD8_P1_NEG: D8_P1.NEG D9_P1.POS TP7_P1.PAD
NetD8_P2_NEG: D8_P2.NEG D9_P2.POS TP7_P2.PAD
NetD8_P3_NEG: D8_P3.NEG D9_P3.POS TP7_P3.PAD
NetD8_P4_NEG: D8_P4.NEG D9_P4.POS TP7_P4.PAD
NetD8_P5_NEG: D8_P5.NEG D9_P5.POS TP7_P5.PAD
NetD8_P6_NEG: D8_P6.NEG D9_P6.POS TP7_P6.PAD
NetD8_P7_NEG: D8_P7.NEG D9_P7.POS TP7_P7.PAD
NetD8_P8_NEG: D8_P8.NEG D9_P8.POS TP7_P8.PAD
NetD8_P9_NEG: D8_P9.NEG D9_P9.POS TP7_P9.PAD
NetD9_P1_NEG: D9_P1.NEG D10_P1.POS TP8_P1.PAD
NetD9_P2_NEG: D9_P2.NEG D10_P2.POS TP8_P2.PAD
NetD9_P3_NEG: D9_P3.NEG D10_P3.POS TP8_P3.PAD
NetD9_P4_NEG: D9_P4.NEG D10_P4.POS TP8_P4.PAD
NetD9_P5_NEG: D9_P5.NEG D10_P5.POS TP8_P5.PAD
NetD9_P6_NEG: D9_P6.NEG D10_P6.POS TP8_P6.PAD
NetD9_P7_NEG: D9_P7.NEG D10_P7.POS TP8_P7.PAD
NetD9_P8_NEG: D9_P8.NEG D10_P8.POS TP8_P8.PAD
NetD9_P9_NEG: D9_P9.NEG D10_P9.POS TP8_P9.PAD
NetD10_P1_NEG: D10_P1.NEG D11_P1.POS TP9_P1.PAD
NetD10_P2_NEG: D10_P2.NEG D11_P2.POS TP9_P2.PAD
NetD10_P3_NEG: D10_P3.NEG D11_P3.POS TP9_P3.PAD
NetD10_P4_NEG: D10_P4.NEG D11_P4.POS TP9_P4.PAD
NetD10_P5_NEG: D10_P5.NEG D11_P5.POS TP9_P5.PAD
NetD10_P6_NEG: D10_P6.NEG D11_P6.POS TP9_P6.PAD
NetD10_P7_NEG: D10_P7.NEG D11_P7.POS TP9_P7.PAD
NetD10_P8_NEG: D10_P8.NEG D11_P8.POS TP9_P8.PAD
NetD10_P9_NEG: D10_P9.NEG D11_P9.POS TP9_P9.PAD
NetD11_P1_NEG: D11_P1.NEG D12_P1.POS TP10_P1.PAD
NetD11_P2_NEG: D11_P2.NEG D12_P2.POS TP10_P2.PAD
NetD11_P3_NEG: D11_P3.NEG D12_P3.POS TP10_P3.PAD
NetD11_P4_NEG: D11_P4.NEG D12_P4.POS TP10_P4.PAD
NetD11_P5_NEG: D11_P5.NEG D12_P5.POS TP10_P5.PAD
NetD11_P6_NEG: D11_P6.NEG D12_P6.POS TP10_P6.PAD
NetD11_P7_NEG: D11_P7.NEG D12_P7.POS TP10_P7.PAD
NetD11_P8_NEG: D11_P8.NEG D12_P8.POS TP10_P8.PAD
NetD11_P9_NEG: D11_P9.NEG D12_P9.POS TP10_P9.PAD
NetD12_P1_NEG: D12_P1.NEG TP11_P1.PAD
NetD12_P2_NEG: D12_P2.NEG TP11_P2.PAD
NetD12_P3_NEG: D12_P3.NEG TP11_P3.PAD
NetD12_P4_NEG: D12_P4.NEG TP11_P4.PAD
NetD12_P5_NEG: D12_P5.NEG TP11_P5.PAD
NetD12_P6_NEG: D12_P6.NEG TP11_P6.PAD
NetD12_P7_NEG: D12_P7.NEG TP11_P7.PAD
NetD12_P8_NEG: D12_P8.NEG TP11_P8.PAD
NetD12_P9_NEG: D12_P9.NEG TP11_P9.PAD
NetD13_P1_NEG: D13_P1.NEG D14_P1.POS
NetD13_P2_NEG: D13_P2.NEG D14_P2.POS
NetD13_P3_NEG: D13_P3.NEG D14_P3.POS
NetD13_P4_NEG: D13_P4.NEG D14_P4.POS
NetD13_P5_NEG: D13_P5.NEG D14_P5.POS
NetD13_P6_NEG: D13_P6.NEG D14_P6.POS
NetD13_P7_NEG: D13_P7.NEG D14_P7.POS
NetD13_P8_NEG: D13_P8.NEG D14_P8.POS
NetD13_P9_NEG: D13_P9.NEG D14_P9.POS
NetD14_P1_NEG: D14_P1.NEG D14_P2.NEG D14_P3.NEG D14_P4.NEG D14_P5.NEG D14_P6.NEG D14_P7.NEG D14_P8.NEG D14_P9.NEG J1.1 J1.4
pads on no net: D13_P1.POS D13_P2.POS D13_P3.POS D13_P4.POS D13_P5.POS D13_P6.POS D13_P7.POS D13_P8.POS D13_P9.POS J1.MP1 J1.MP2 J2.1 J2.2 J2.3 J2.4 J2.MP1 J2.MP2 S13_P1.NEG S13_P1.POS S13_P2.NEG S13_P2.POS S13_P3.NEG S13_P3.POS S13_P4.NEG S13_P4.POS S13_P5.NEG S13_P5.POS S13_P6.NEG S13_P6.POS S13_P7.NEG S13_P7.POS S13_P8.NEG S13_P8.POS S13_P9.NEG S13_P9.POS S14_P1.NEG S14_P1.POS S14_P2.NEG S14_P2.POS S14_P3.NEG S14_P3.POS S14_P4.NEG S14_P4.POS S14_P5.NEG S14_P5.POS S14_P6.NEG S14_P6.POS S14_P7.NEG S14_P7.POS S14_P8.NEG S14_P8.POS S14_P9.NEG S14_P9.POS S15_P1.NEG S15_P1.POS S15_P2.NEG S15_P2.POS S15_P3.NEG S15_P3.POS S15_P4.NEG S15_P4.POS S15_P5.NEG S15_P5.POS S15_P6.NEG S15_P6.POS S15_P7.NEG S15_P7.POS S15_P8.NEG S15_P8.POS S15_P9.NEG S15_P9.POS S16_P1.NEG S16_P1.POS S16_P2.NEG S16_P2.POS S16_P3.NEG S16_P3.POS S16_P4.NEG S16_P4.POS S16_P5.NEG S16_P5.POS S16_P6.NEG S16_P6.POS S16_P7.NEG S16_P7.POS S16_P8.NEG S16_P8.POS S16_P9.NEG S16_P9.POS S17_P1.NEG S17_P1.POS S17_P2.NEG S17_P2.POS S17_P3.NEG S17_P3.POS S17_P4.NEG S17_P4.POS S17_P5.NEG S17_P5.POS S17_P6.NEG S17_P6.POS S17_P7.NEG S17_P7.POS S17_P8.NEG S17_P8.POS S17_P9.NEG S17_P9.POS S18_P1.NEG S18_P1.POS S18_P2.NEG S18_P2.POS S18_P3.NEG S18_P3.POS S18_P4.NEG S18_P4.POS S18_P5.NEG S18_P5.POS S18_P6.NEG S18_P6.POS S18_P7.NEG S18_P7.POS S18_P8.NEG S18_P8.POS S18_P9.NEG S18_P9.POS TP12_P1.PAD TP12_P2.PAD TP12_P3.PAD TP12_P4.PAD TP12_P5.PAD TP12_P6.PAD TP12_P7.PAD TP12_P8.PAD TP12_P9.PAD